# Altium PCB Kicker2018_PCB.PcbDoc
Units mm, origin at the board's own origin, x right, y up, seen from the top; angles counter-clockwise.
Board outline 67.76 x 43.08 mm, 2 copper layers (Top Layer, Bottom Layer); 49 components, 29 nets, 154 pads, 725 vias.
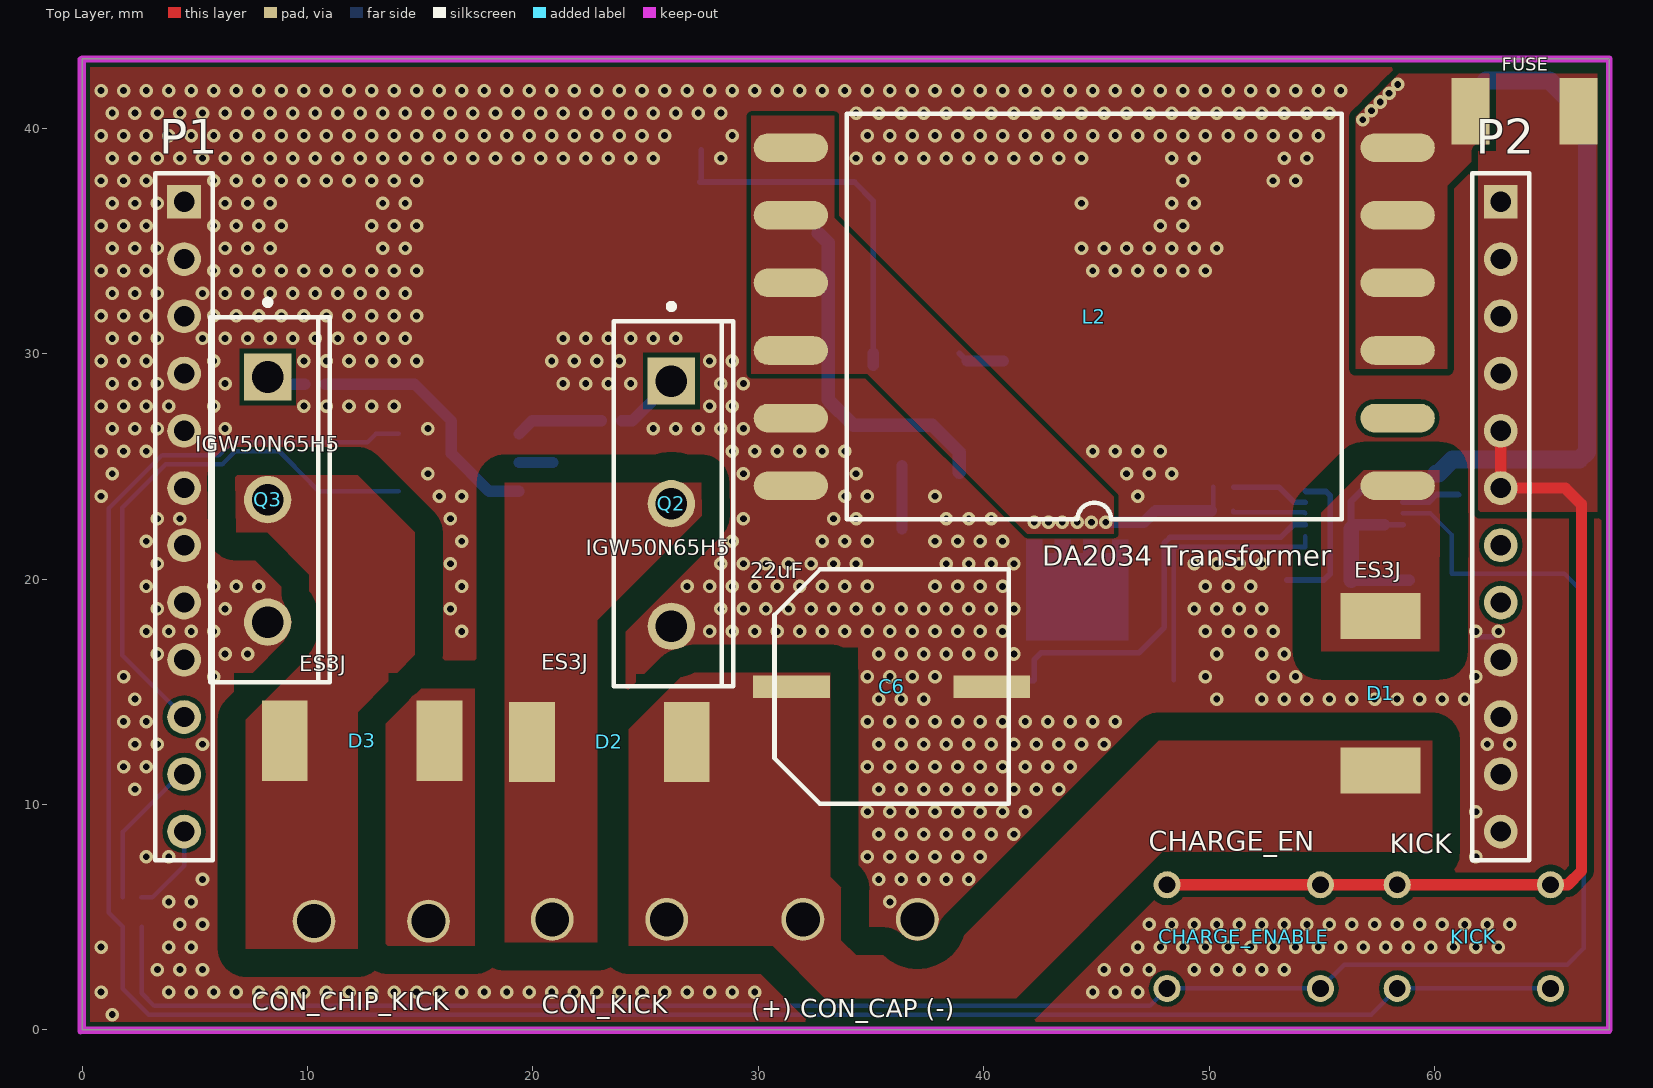
[diagram p0: Top Layer view]
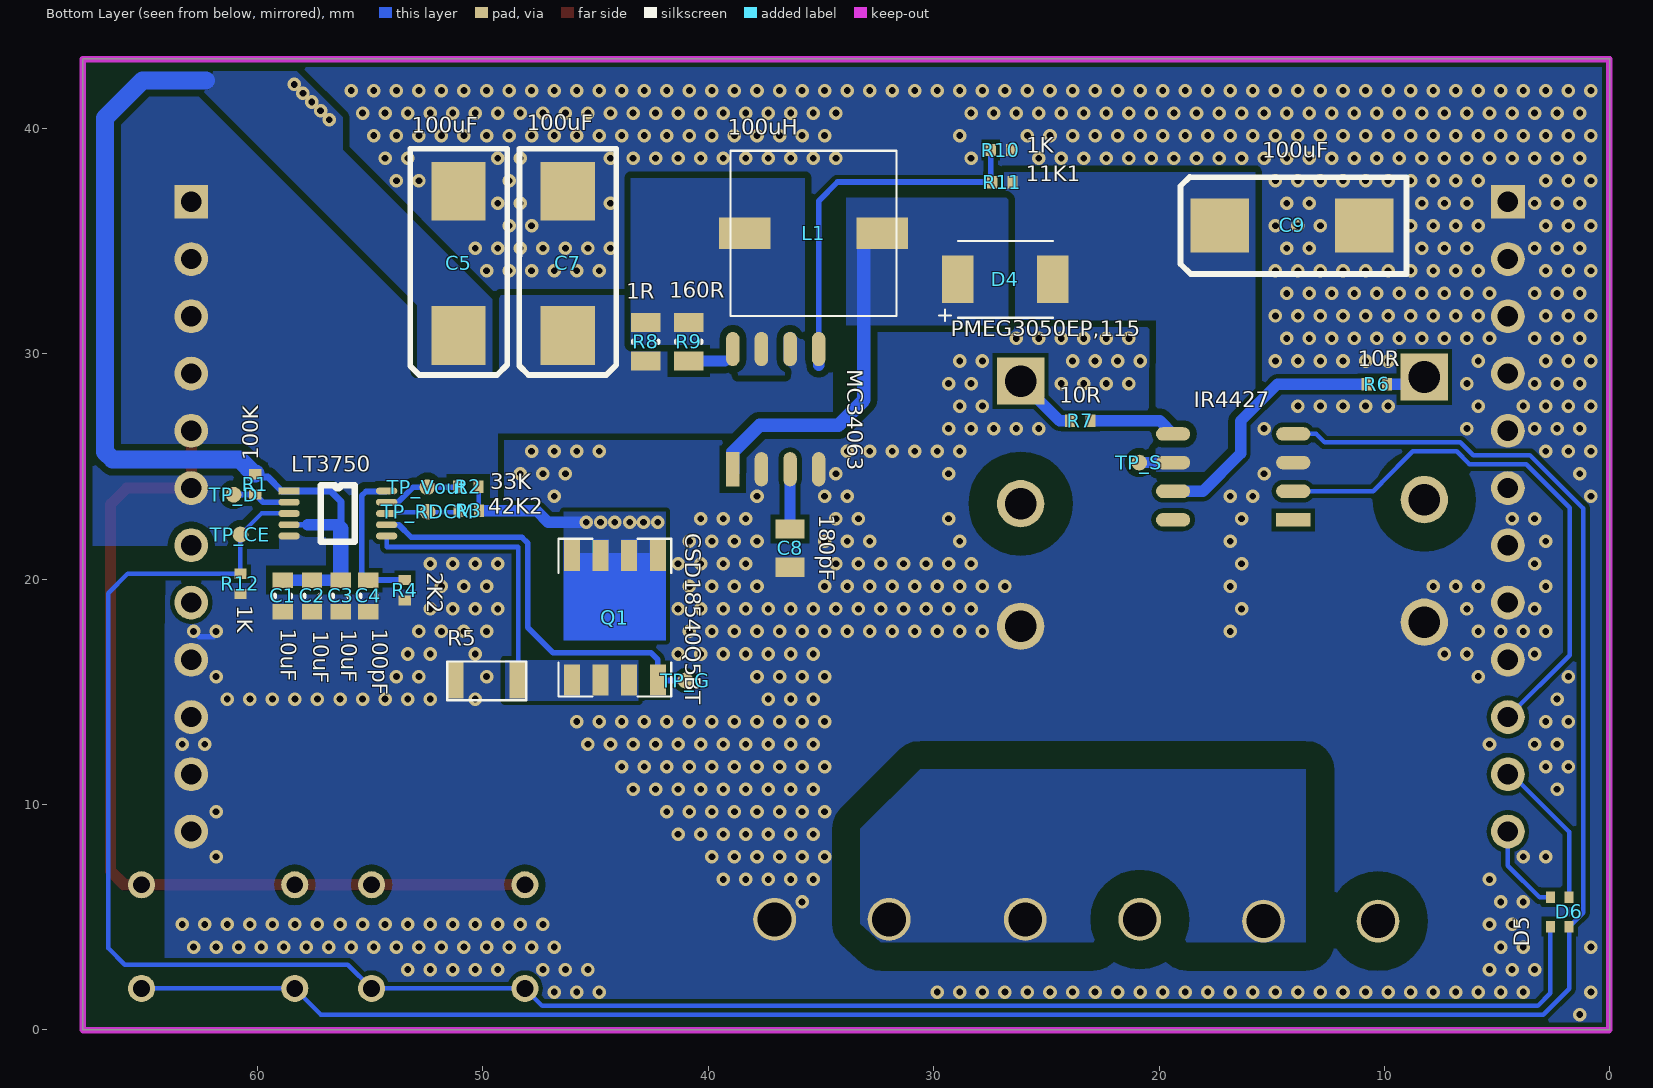
[diagram p1: Bottom Layer view, seen from below]
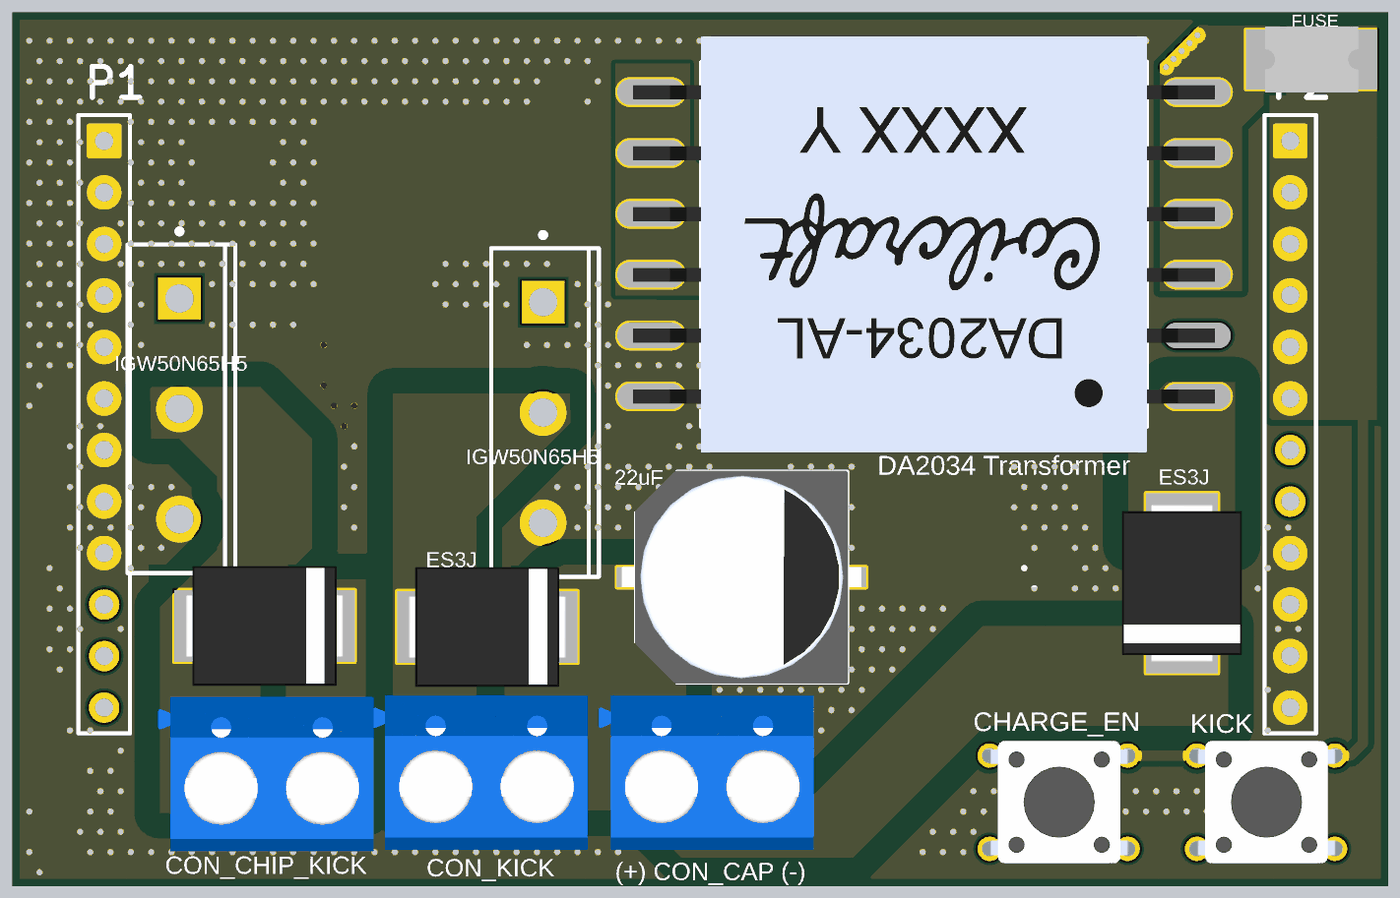
[diagram p2: 3D render of the assembled board from above, using the file's embedded part models]

## Layer stack, top to bottom
Top Solder: solder mask 0.0102, Solder Resist, Dk 3.5
Top Layer: signal copper 0.0356
Dielectric 1: dielectric 0.32, FR-4, Dk 4.8
Bottom Layer: signal copper 0.0356
Bottom Solder: solder mask 0.0102, Solder Resist, Dk 3.5

## Board outline
67.76,0 67.76,43.078 0,43.078 0,0 32.814,0

## Design rules (kind name [scope] priority, off if disabled: settings)
BoardOutlineClearance [All] p1: gap=0.254 ignorepadtopadclearanceinfootprint=FALSE
Clearance Clearance_1 [InNet('NetC1_1') vs InNet('NetC1_1')] p1: gap=0 ignorepadtopadclearanceinfootprint=TRUE
Clearance VCC/Vs [InNetClass('VCC/Vs')] p2: gap=0.3 ignorepadtopadclearanceinfootprint=TRUE
Clearance NetLT3750_6 [OnLayer('Top Layer') vs InNet('NetLT3750_6')] p3: gap=0.5 ignorepadtopadclearanceinfootprint=TRUE
Clearance HV [InNetClass('HV')] p4: gap=1.25 ignorepadtopadclearanceinfootprint=TRUE
Clearance [All] p5: gap=0.2 ignorepadtopadclearanceinfootprint=TRUE
Height [All] p1: minheight=0 maxheight=50 prefheight=12.7
PlaneClearance [InNet('NetC1_1')] p1: clearance=0
PlaneConnect [All] p1: planeconnectstyle=Direct reliefexpansion=0.508 reliefentries=4 reliefconductorwidth=0.254 reliefairgap=0.254
PolygonConnect [All] p1: connectstyle=Direct reliefconductorwidth=0.254 reliefentries=4 polygonreliefangle="90 Angle" airgapwidth=0.254
RoutingVias [All] p1: holewidth=0.3 width=0.6 viastyle="Through Hole" minholewidth=0.3 minwidth=0.6 maxholewidth=2 maxwidth=2
SolderMaskExpansion [All] p1: expansion=0.102
Width [All] p1: maxlimit=5 minlimit=0.2 preferedwidth=0.2
27 further rules are at their usual default settings.

## Classes and differential pairs
net class HV: Cap+ CHIP_KICK- KICK- NetD1_D1-
net class VCC/Vs: NetC1_1 NetD4_2 NetL1_2 VCC Vs

## Components (designator, comment, footprint, x,y, rotation, side; value= is the part's Value field where it differs from the comment)
"(+) CON_CAP (-)" "OSTTA024163" "TERM BLOCK 2P" 34.516,4.902 r0 top (schematic designator CON_CAP)
C1 "10uF" CAPC0603(1608)55_L 58.874,19.256 r270 bottom
C2 "10uF" CAPC0603(1608)55_L 57.579,19.256 r270 bottom
C3 "10uF" CAPC0603(1608)55_L 56.309,19.256 r270 bottom
C4 "100pF" CAPC0603(1608)55_L 55.082,19.256 r90 bottom
C5 "100uF" 7343-CAPPOL 51.07,34.011 r90 bottom
C6 "22uF" "CAP ALUM 22UF 250V" 35.915,15.23 r180 top
C7 "100uF" 7343-CAPPOL 46.225,34.011 r90 bottom
C8 "180pF" 0805-CAP 36.368,21.375 r90 bottom
C9 "100uF" 7343-CAPPOL 14.094,35.687 r180 bottom
CHARGE_ENABLE "CHARGE_EN" "TACTILE SWITCH" 51.534,4.14 r180 top
CON_CHIP_KICK "OSTTA024163" "TERM BLOCK 2P" 12.824,4.826 r0 top
CON_KICK "OSTTA024163" "TERM BLOCK 2P" 23.391,4.902 r0 top
D1 "ES3J" DIODE 57.604,14.935 r90 top
D2 "ES3J" DIODE 23.391,12.776 r180 top
D3 "ES3J" DIODE 12.418,12.827 r180 top
D4 "PMEG3050EP,115" PCBComponent#1 26.82,33.299 r0 bottom
D5 "BAS40 Diode" "DIODE SOD-523" 2.639,5.232 r270 bottom
D6 "BAS40 Diode" "DIODE SOD-523" 1.801,5.232 r270 bottom
FUSE "MF-MSMF250/16X-2" MF-MSMF250/16X-PCB 63.99,40.76 r180 top
IR4427 "GATE DRIVER" IR4427 16.71,24.536 r0 bottom
KICK "KICK" "TACTILE SWITCH" 61.745,4.14 r180 top
L1 "100uH" INDUCTOR 35.329,35.357 r0 bottom
L2 "DA2034 Transformer" "DA2034 TRANSFORMER" 58.362,24.147 r180 top
LT3750 "Flyback Regulator" LT3750 58.599,23.913 r180 bottom
MC34063 "Switching Voltage Regulator" DIP-8 38.91,24.75 r90 bottom
P1 "Header 12" HDR1X12 4.521,36.74 r270 top
P2 "Header 12" HDR1X12 62.941,36.74 r270 top
Q1 "CSD18540Q5BT" PCBComponent#2 44.142,18.288 r270 bottom
Q2 "IGW50N65H5" INF-PG-TO247-3-44 26.14,23.35 r0 top
Q3 "IGW50N65H5" INF-PG-TO247-3-44 8.23,23.53 r0 top
R1 "100K" 0402-RES-HD 60.094,24.206 r270 bottom value=100k
R2 "33K" 0402-RES-HD 50.641,24.103 r180 bottom
R3 "42K2" 0402-RES-HD 50.623,23.034 r180 bottom value=42.2K
R4 "2K2" 0402-RES-HD 53.456,19.51 r270 bottom value=2.2K
R5 "15m" RES1206 49.832,15.519 r0 bottom
R6 "10R" 0402-RES-HD 10.335,28.651 r180 bottom value=10
R7 "10R" 0402-RES-HD 23.492,27.026 r0 bottom value=10
R8 "1R" 0805-RES 42.771,30.531 r90 bottom
R9 "160R" 0805-RES 40.866,30.531 r90 bottom value=160
R10 "1K" 0402-RES-HD 27.016,39.04 r0 bottom
R11 "11K1" 0402-RES-HD 26.947,37.617 r0 bottom value=11k1
R12 "1K" 0402-RES-HD 60.754,19.787 r90 bottom
TP_CE "" TP-PCB 60.754,21.979 r90 bottom net-tie
TP_D "" TP-PCB 61.059,23.749 r90 bottom locked net-tie
TP_G "" TP-PCB 41.01,15.5 r90 bottom locked net-tie
TP_RDCM "" TP-PCB 52.45,22.987 r90 bottom net-tie
TP_S "" TP-PCB 20.876,25.171 r90 bottom locked net-tie
TP_Vout "" TP-PCB 52.46,24.082 r90 bottom net-tie

## Footprints (in the part's own frame and the unit in brackets; to place one, negate y for a bottom-side part, rotate by r counter-clockwise, add the part's x,y. Pads: shape width x height; smd on the part's side, far side on the other; paste and mask are expansions set on the pad)
0402-RES-HD [mm] "Chip Resistor, Body 1.0x0.5mm, IPC High Density"
  rect 0.45x0.55 smd: 1(-0.45,0) 2(0.45,0)
  body extent -0.52,-0.27 0.53,0.28, height 0.4
0805-CAP [mm] "Chip Resistor, Body 2.0x1.3mm, IPC High Density"
  rect 0.85x1.3 smd: 1(-0.85,0) 2(0.85,0)
  body extent -1.1,-0.67 1.1,0.68, height 0.7
0805-RES [mm] "Chip Resistor, Body 2.0x1.3mm, IPC High Density"
  rect 0.85x1.3 smd: 1(-0.85,0) 2(0.85,0)
  silkscreen extent -0.05,-0.55 0.05,0.55, body extent -1.1,-0.67 1.1,0.68, height 0.7
7343-CAPPOL [mm] "SMT Capacitor, 2 Leads, Body 7.3x4.3mm"
  rect 2.6x2.4 smd: 1(-3.202,0.007) 2(3.198,0.007)
  silkscreen extent -4.95,-2.15 5.08,2.16, body extent -3.49,-2.03 3.51,2.04, height 4.05
"CAP ALUM 22UF 250V" [mm] "22uF"
  rect 3.4x1 smd: Cap+(4.445,0) Cap-(-4.445,0)
  silkscreen extent -5.2,-5.2 5.2,5.2, body extent -8.64,-5.25 5.9,5.46, height 10.46
CAPC0603(1608)55_L [mm] "Chip Capacitor, Body 1.6x0.8mm, Height 0.55mm, IPC High Density"
  rect 0.7x0.9 smd: 1(-0.7,0) 2(0.7,0)
  silkscreen extent -0.05,-0.35 0.05,0.35, body extent -0.87,-0.47 0.88,0.48, height 0.55
"DA2034 TRANSFORMER" [mm]
  oval 3.3x1.27 smd: 1(0,0) 2(0,-3) 3(0,-6) 4(0,-9) 5(0,-12) 6(0,-15) 7(26.92,-15) 8(26.92,-12) 9(26.92,-9) 10(26.92,-6) 11(26.92,-3) 12(26.92,0)
  silkscreen extent 2.48,-16.5 24.44,1.5, body extent -0.86,-17.78 27.79,2.79, height 11.18
DIODE [mil]
  rect 80x140 smd: D1+(-135,0) D1-(135,0)
  body extent -154,-116 154,116, height 95
"DIODE SOD-523" [mm]
  rect 0.5x0.4 smd mask+0.05: 1(-0.65,0) 2(0.65,0)
  body extent -0.8,-0.4 0.8,0.4, height 0.7
DIP-8 [mm] "MC34063 Footprint"
  rect 1.52x0.6 smd: 1(0.127,0)
  oval 1.52x0.6 smd: 2(0.127,-1.27) 3(0.127,-2.54) 4(0.127,-3.81) 5(5.461,-3.81) 6(5.461,-2.54) 7(5.461,-1.27) 8(5.461,0)
  body extent -0.21,-4.35 5.79,0.55, height 1.75
HDR1X12 [mm] "Connector; Header; 12 Position"
  rect 1.5x1.5 hole 0.9: 1(0,0)
  round 1.5 hole 0.9: 2(2.54,0) 3(5.08,0) 4(7.62,0) 5(10.16,0) 6(12.7,0) 7(15.24,0) 8(17.78,0) 9(20.32,0) 10(22.86,0) 11(25.4,0) 12(27.94,0)
  silkscreen extent -1.27,-1.27 29.21,1.27
INDUCTOR [mil]
  rect 90x55 smd: 1(-120,0) 2(120,0)
  silkscreen extent -145,-144 145,145, body extent -145,-139 142,149, height 180
INF-PG-TO247-3-44 [mm] "FM, 3-Leads, Body 5.02x15.94mm, Pitch 5.44mm"
  rect 2.1x2.1 hole 1.4: 1(0,5.44)
  round 2.1 hole 1.4: 2(0,0) 3(0,-5.44)
  silkscreen extent -2.56,-8.1 2.75,8.87, body extent -2.53,-8.08 2.72,8.08, height 25.5
IR4427 [mm]
  rect 1.52x0.6 smd: 1(-2.667,1.905)
  oval 1.52x0.6 smd: 2(-2.667,0.635) 3(-2.667,-0.635) 4(-2.667,-1.905) 5(2.667,-1.905) 6(2.667,-0.635) 7(2.667,0.635) 8(2.667,1.905)
  body extent -3,-2.45 3,2.45, height 1.75
LT3750 [mm]
  rect 0.95x0.305 smd: 1(0,0)
  oval 0.95x0.305 smd: 2(0,-0.5) 3(0,-1) 4(0,-1.5) 5(0,-2) 6(4.33,-2) 7(4.33,-1.5) 8(4.33,-1) 9(4.33,-0.5) 10(4.33,0)
  silkscreen extent 1.41,-2.25 2.92,0.25, body extent -0.29,-2.52 4.61,0.48, height 1.15
MF-MSMF250/16X-PCB [mm] "Chip PTC RESETTABLE"
  rect 1.68x2.95 smd: 1(-2.39,0) 2(2.39,0)
  body extent -2.3,-1.62 2.3,1.62, height 1.15
PCBComponent#1 [mm]
  rect 1.4x2.1 smd: 1(-2.1,0) 2(2.1,0)
  silkscreen extent -2.1,-1.7 2.93,1.85, body extent -2.5,-1.35 2.5,1.35, height 1.1
PCBComponent#2 [mm]
  rect 1.372x0.711 smd: 1(2.769,-1.905) 2(2.769,-0.635) 3(2.769,0.635) 4(2.769,1.905) 5(-2.769,1.905) 6(-2.769,0.635) 7(-2.769,-0.635) 8(-2.769,-1.905)
  Top Layer region: -3.454,2.261 0.991,2.261 0.991,-2.261 -3.454,-2.261 -3.454,-1.549 -2.87,-1.549 -2.87,-0.991 -3.454,-0.991 -3.454,-0.279 -2.87,-0.279 -2.87,0.279 -3.454,0.279 -3.454,0.991 -2.87,0.991 -2.87,1.549 -3.454,1.549
  silkscreen extent -3.5,-2.5 3.5,2.5, body extent -3.28,-2.53 2.72,2.47, height 1.1
RES1206 [mil]
  rect 30x65 smd: 1(-55,0) 2(55,0)
  silkscreen extent -69,-33 69,35, body extent -63,-33 63,33, height 21
"TACTILE SWITCH" [mm]
  round 1.2 hole 0.75: 1(-3.4,-2.3) 2(3.4,-2.3) 3(-3.4,2.3) 4(3.4,2.3)
  body extent -3.9,-3.01 3.85,3.02, height 3.01
"TERM BLOCK 2P" [mm]
  round 1.9 hole 1.5: 1(-2.54,0) 2(2.54,0)
  body extent -5.64,-3.1 4.96,4.5, height 10
TP-PCB [mm]
  round 0.7 smd paste-1: 1(0,0)

## Part data
"(+) CON_CAP (-)" CON_CHIP_KICK CON_KICK: library part "Term Block 2P", "2 Position Wire to Board Terminal Block Horizontal with Board 0.200\" (5.08mm) Through Hole"
C1 C2 C3: library part C0603-10uF-16V-1, "CAP CER 10UF 16V X5R 0603", Part No=EMK107BBJ106MA-T, Cod EMS=05.281.019.592
C4: library part CC0603--1, "CAP CER 100PF 50V NP0 0603", Part No=GRM1885C1H101JA01D
C5 C7 C9: library part CT2917-100uF-1, "CAP TANT 100uF 25V 20% ESR = 30mOhm @ 100 kHz", Part No=T521X107M025ATE030
C6: library part "CAP ALUM 22UF 250V"
C8: library part CC0805-180pF-2, "CAP CER 180PF 50V NP0 0805", Part No=C0805C181K5GACTU, Cod EMS=05.281.019.399
CHARGE_ENABLE KICK: library part SW-SPST, "Single-Pole, Single-Throw Switch", LatestRevisionDate=17-Jul-2002, LatestRevisionNote="Re-released for DXP Platform.", PackageDescription="Switch; 2 Leads", PackageReference=SPST-2, Published=24-Mar-1999, Publisher="Altium Limited"
D4: library part PMEG3050EP,115-01.A.5, "DIODE SCHOTTKY 30V 5A SOD128", Cod EMS=05.284.051.031, Part No=PMEG3050EP,115
FUSE: "PTC RESETTABLE"
IR4427: library part IR4427, "IC DRIVER DUAL LOW SIDE 8-SOIC"
L1: library part Inductor, "Fixed Inductors 100uH 0.86A SMT"
LT3750: library part LT3750
MC34063: library part MC34063
P1 P2: "Header, 12-Pin", LatestRevisionDate=17-Jul-2002, LatestRevisionNote="Re-released for DXP Platform.", Publisher="Altium Limited"
Q1: library part CSD18540Q5BT-1, "MOSFET N-CH 60V 100A 8VSON", Part No=CSD18540Q5BT
Q2 Q3: "650 V IGBT High Speed Switching Series Fifth Generation, 80 A IC, PG-TO247-3-44, Tube, Green", Manufacturer=Infineon, Supplier Part Number 1=N/A, Switching Frequency="TRENCHSTOP5 10-120 kHz", ComponentLink1Description="Manufacturer URL", ComponentLink1URL=http://www.infineon.com/, ComponentLink2Description=Datasheet, ComponentLink2URL=http://www.infineon.com/dgdl/DS_IGW50N65H5_1_1.pdf?folderId=db3a3043156fd5730115f56849b61941&fileId=db3a30433af5291e013af900f52c5c25&location=en.Products.IGBTs.IGBT_with_Anti-Parallel_Diode.TRENCHSTOP_5.DATASHEET.DS_IGW50N65H5_1_1.pdf, ComponentLink3Description="Package Specification", ComponentLink3URL=http://www.infineon.com/cms/packages/Leaded_and_through-hole/P-PG-TO247/P-PG-TO247-3-44.html?__locale=en, DatasheetVersion="Rev. 1.1", Green=TRUE, Group="IGBT without Anti-Parallel Diode", Halogen-free=available, IC(max)@ 25degrees="80 A", IC(max)@ 100degrees="56 A", ICpuls(max)="150 A", Mounting Technology="Through Hole", PackageDescription="3-Pin Plastic (Green) Transistor Single Outline Package, 15.94 x 20.95 mm Body, 5.44 mm Pitch", PackageReference=PG-TO247-3-44, PackageVersion="Rev. 03", Packing=Tube, PartNumber=IGW50N65H5, Ptot(max)="305 W", Supplier 1=Mouser, VCE(max)="650 V", VCE(sat)(typ)="1.65 V"
R1: library part R0402-100K-11, "RES 100K OHM 1/10W 1% 0402 SMD 1", Part No=ERJ-2GEJ104X, Cod EMS=05.280.029.504, Family=ERJ-2GE....X, Family Description="RESISTOR FILME ESPESSO 0R-1M / 1/10W / 5% /  0402. P/N: ERJ-2GE....X – PANASONIC ELECTRONIC COMPONENTS."
R2: library part R0402-33K-7, "RES 33K OHM 1/10W 1% 0402 SMD", Part No=ERJ-2RKF3302X, Cod EMS=05.280.029.535, Family=ERJ-2RKF....X, Family Description="RESISTOR FILME ESPESSO 10R-1M / 1/10W / 1% / 0402. P/N: ERJ-2RKF....X – PANASONIC ELECTRONIC COMPONENTS."
R3: library part RESISTOR, "RES 42.2K OHM 1/10W 1% 0402 SMD", Part No=ERJ-2RKF4222X
R4: library part R0402-2K2-5, "RES 2.2K OHM 1/10W 1% 0402 SMD", Part No=ERJ-2RKF2201X, Cod EMS=05.280.029.541, Family=ERJ-2RKF....X, Family Description="RESISTOR FILME ESPESSO 10R-1M / 1/10W / 1% / 0402. P/N: ERJ-2RKF....X – PANASONIC ELECTRONIC COMPONENTS."
R5: library part Res2, "Resistor", LatestRevisionDate=17-Jul-2002, LatestRevisionNote="Re-released for DXP Platform.", PackageDescription="Axial Device, Thru-Hole; 2 Leads; 0.4 in Pin Spacing", PackageReference=AXIAL-0.4, Published=8-Jun-2000, Publisher="Altium Limited"
R6 R7: library part R0402-10R-6, "RES 10 OHM 1/10W 1% 0402 SMD", Part No=ERJ-2RKF10R0X, Cod EMS=05.280.029.523, Family=ERJ-2RKF....X, Family Description="RESISTOR FILME ESPESSO 10R-1M / 1/10W / 1% / 0402. P/N: ERJ-2RKF....X – PANASONIC ELECTRONIC COMPONENTS."
R8: library part R0805-1R-1%-1, "RES SMD 1 OHM 1% 1/8W 0805", Part No=CRCW08051R00FKEA, Cod EMS=05.280.029.391
R9: library part R0805-160R-5, "RES 160 OHM 1/8W .5% 0805 SMD", Part No=ERA-6AED161V, Cod EMS=05.280.029.516, Family=ERA-6AED...V
R10 R12: library part R0402-1K-A.9, "RES 1K OHM 1/10W 1% 0402 SMD", Part No=ERJ-2RKF1001X, Cod EMS=05.280.029.527, Family=ERJ-2RKF....X, Family Description="RESISTOR FILME ESPESSO 10R-1M / 1/10W / 1% / 0402. P/N: ERJ-2RKF....X – PANASONIC ELECTRONIC COMPONENTS."
R11: library part R0402-11K1-1, "RES 11.1 KOHM 1/16W 0.1% 0402 SMD", Part No=TNPW040211K1BEED
TP_CE TP_D TP_G TP_RDCM TP_S TP_Vout: library part TESTPOINT-CMP-2, "TESTPOINT"

## Via types
v1: diameter 0.6, hole 0.3, Top Layer to Bottom Layer, tented both sides, 714 vias
v2: diameter 0.6, hole 0.3, Top Layer to Bottom Layer, 11 vias

## Nets (pads, with @x,y where several pads share a name; then routed paths per layer and width w, separated by ;. In a path a pad name is that pad's centre, name@x,y a point inside that pad or via, vN(x,y) a via of type N, cw(c..) or ccw(c..) an arc to the next point about the centre after c; other vN are vias at no path point)
Cap+: "(+) CON_CAP (-).1" C6.Cap+ CON_CHIP_KICK.2 CON_KICK.2 D1.D1+ D2.D1+ D3.D1+
CHARGE_ENABLE: CHARGE_ENABLE.3 CHARGE_ENABLE.4 D5.2 LT3750.3 R12.2 TP_CE.1 | length 94.5
  Bottom Layer w0.2: D5.2 2.639,1.627 3.187,1.078 47.372,1.078 CHARGE_ENABLE.4 CHARGE_ENABLE.3 55.989,2.896 65.885,2.896 66.621,3.632 66.621,19.38 65.765,20.237 R12.2 TP_CE.1 59.82,22.913 LT3750.3
CHIP_KICK: Q3.1 R6.2 | length 2.2
  Bottom Layer w0.5: Q3.1@7.77,28.958 Q3.1@7.897,28.831 ; Q3.1@7.897,28.651 R6.2
CHIP_KICK-: CON_CHIP_KICK.1 D3.D1- Q3.2
CHIP_KICK_SIGNAL: IR4427.2 P1.10 | length 24.5
  Bottom Layer w0.2: P1.10 1.775,16.626 1.775,23.165 3.706,25.095 6.224,25.095 6.796,25.667 8.743,25.667 10.12,24.291 10.12,24.28 10.498,23.901 IR4427.2
GATE: LT3750.7 Q1.4 TP_G.1 | length 18.9
  Bottom Layer w0.254: TP_G.1 42.218,15.5 Q1.4 42.237,16.434 42.542,16.739 46.886,16.739 48.008,17.861 48.008,21.603 48.258,21.853 53.171,21.853 53.728,22.41 54.266,22.41 LT3750.7
GND: "(+) CON_CAP (-).2" C1.2 C2.2 C3.2 C4.1 C5.2 C6.Cap- C7.2 C8.1 C9.2 IR4427.3 L2.11 L2.12 LT3750.5 MC34063.2 MC34063.4 P1.1 P1.2 P1.3 P1.4 P1.5 P1.6 P1.7 P1.8 P1.9 P2.9 P2.10 P2.11 P2.12 Q2.3 Q3.3 R4.2 R5.2 R10.1 R12.1 | length 1.2
  Bottom Layer w0.254: P1.6 P1.6@5.089,24.04 ; v1@61.966,17.448 62.587,17.448
  other v1: 1.337,0.678 0.837,1.678 3.837,1.678 4.837,1.678 5.837,1.678 6.837,1.678 7.837,1.678 8.837,1.678 9.837,1.678 10.837,1.678 11.837,1.678 12.837,1.678 13.837,1.678 14.837,1.678 15.837,1.678 16.837,1.678 17.837,1.678 18.837,1.678 19.837,1.678 20.837,1.678 21.837,1.678 22.837,1.678 23.837,1.678 24.837,1.678 25.837,1.678 26.837,1.678 27.837,1.678 28.837,1.678 29.837,1.678 44.837,1.678 45.837,1.678 46.837,1.678 3.337,2.678 4.337,2.678 5.337,2.678 45.337,2.678 46.337,2.678 47.337,2.678 49.337,2.678 50.337,2.678 51.337,2.678 52.337,2.678 53.337,2.678 0.837,3.678 3.837,3.678 4.837,3.678 46.837,3.678 47.837,3.678 48.837,3.678 49.837,3.678 50.837,3.678 51.837,3.678 52.837,3.678 53.837,3.678 54.837,3.678 55.837,3.678 56.837,3.678 57.837,3.678 58.837,3.678 59.837,3.678 60.837,3.678 61.837,3.678 62.837,3.678 4.337,4.678 5.337,4.678 47.337,4.678 48.337,4.678 49.337,4.678 50.337,4.678 51.337,4.678 52.337,4.678 53.337,4.678 54.337,4.678 55.337,4.678 56.337,4.678 57.337,4.678 58.337,4.678 59.337,4.678 60.337,4.678 61.337,4.678 62.337,4.678 63.337,4.678 3.837,5.678 4.837,5.678 35.837,5.678 5.337,6.678 35.337,6.678 36.337,6.678 37.337,6.678 38.337,6.678 39.337,6.678 2.837,7.678 3.837,7.678 34.837,7.678 35.837,7.678 36.837,7.678 37.837,7.678 38.837,7.678 39.837,7.678 61.837,7.678 35.337,8.678 36.337,8.678 37.337,8.678 38.337,8.678 39.337,8.678 40.337,8.678 41.337,8.678 34.837,9.678 35.837,9.678 36.837,9.678 37.837,9.678 38.837,9.678 39.837,9.678 40.837,9.678 41.837,9.678 61.837,9.678 2.337,10.678 35.337,10.678 35.337,10.678 36.337,10.678 37.337,10.678 38.337,10.678 39.337,10.678 40.337,10.678 40.337,10.678 41.337,10.678 42.337,10.678 43.337,10.678 1.837,11.678 2.837,11.678 34.837,11.678 35.837,11.678 36.837,11.678 37.837,11.678 38.837,11.678 39.837,11.678 40.837,11.678 41.837,11.678 42.837,11.678 43.837,11.678 2.337,12.678 3.337,12.678 5.337,12.678 35.337,12.678 36.337,12.678 37.337,12.678 38.337,12.678 39.337,12.678 40.337,12.678 41.337,12.678 42.337,12.678 43.337,12.678 44.337,12.678 45.337,12.678 62.337,12.678 63.337,12.678 1.837,13.678 2.837,13.678 34.837,13.678 35.837,13.678 36.837,13.678 37.837,13.678 38.837,13.678 39.837,13.678 40.837,13.678 41.837,13.678 42.837,13.678 43.837,13.678 44.837,13.678 45.837,13.678 2.337,14.678 35.337,14.678 36.337,14.678 37.337,14.678 50.337,14.678 52.337,14.678 53.337,14.678 54.337,14.678 55.337,14.678 56.337,14.678 57.337,14.678 58.337,14.678 59.337,14.678 60.337,14.678 61.337,14.678 1.837,15.678 5.837,15.678 34.837,15.678 35.837,15.678 36.837,15.678 37.837,15.678 37.837,15.678 49.837,15.678 52.837,15.678 52.837,15.678 53.837,15.678 61.837,15.678 3.337,16.678 6.337,16.678 7.337,16.678 35.337,16.678 36.337,16.678 37.337,16.678 38.337,16.678 39.337,16.678 40.337,16.678 41.337,16.678 50.337,16.678 52.337,16.678 53.337,16.678 2.837,17.678 3.837,17.678 4.837,17.678 5.837,17.678 16.837,17.678 27.837,17.678 28.837,17.678 29.837,17.678 30.837,17.678 31.837,17.678 32.837,17.678 33.837,17.678 34.837,17.678 35.837,17.678 36.837,17.678 37.837,17.678 38.837,17.678 39.837,17.678 40.837,17.678 49.837,17.678 50.837,17.678 51.837,17.678 52.837,17.678 61.837,17.678 62.837,17.678 3.337,18.678 6.337,18.678 16.337,18.678 28.337,18.678 29.337,18.678 30.337,18.678 31.337,18.678 32.337,18.678 33.337,18.678 34.337,18.678 35.337,18.678 36.337,18.678 37.337,18.678 38.337,18.678 39.337,18.678 40.337,18.678 41.337,18.678 49.337,18.678 50.337,18.678 51.337,18.678 52.337,18.678 2.837,19.678 5.837,19.678 6.837,19.678 7.837,19.678 16.837,19.678 26.837,19.678 27.837,19.678 28.837,19.678 29.837,19.678 30.837,19.678 31.837,19.678 32.837,19.678 33.837,19.678 34.837,19.678 37.837,19.678 38.837,19.678 39.837,19.678 40.837,19.678 49.837,19.678 50.837,19.678 51.837,19.678 3.337,20.678 16.337,20.678 28.337,20.678 29.337,20.678 30.337,20.678 30.337,20.678 31.337,20.678 32.337,20.678 33.337,20.678 34.337,20.678 38.337,20.678 39.337,20.678 40.337,20.678 40.337,20.678 41.337,20.678 49.337,20.678 50.337,20.678 50.337,20.678 51.337,20.678 52.337,20.678 2.837,21.678 16.837,21.678 28.837,21.678 32.837,21.678 33.837,21.678 34.837,21.678 37.837,21.678 38.837,21.678 39.837,21.678 40.837,21.678 3.337,22.678 4.337,22.678 16.337,22.678 29.337,22.678 33.337,22.678 34.337,22.678 38.337,22.678 39.337,22.678 40.337,22.678 0.837,23.678 15.837,23.678 16.837,23.678 33.837,23.678 34.837,23.678 37.837,23.678 46.837,23.678 1.337,24.678 15.337,24.678 29.337,24.678 34.337,24.678 46.337,24.678 47.337,24.678 48.337,24.678 0.837,25.678 1.837,25.678 2.837,25.678 2.837,25.678 28.837,25.678 29.837,25.678 30.837,25.678 31.837,25.678 32.837,25.678 32.837,25.678 33.837,25.678 44.837,25.678 45.837,25.678 46.837,25.678 47.837,25.678 47.837,25.678 1.337,26.678 2.337,26.678 3.337,26.678 6.337,26.678 15.337,26.678 25.337,26.678 26.337,26.678 27.337,26.678 28.337,26.678 29.337,26.678 0.837,27.678 1.837,27.678 2.837,27.678 3.837,27.678 5.837,27.678 9.837,27.678 10.837,27.678 11.837,27.678 12.837,27.678 13.837,27.678 27.837,27.678 28.837,27.678 1.337,28.678 2.337,28.678 3.337,28.678 6.337,28.678 21.337,28.678 22.337,28.678 23.337,28.678 24.337,28.678 28.337,28.678 29.337,28.678 0.837,29.678 1.837,29.678 2.837,29.678 5.837,29.678 9.837,29.678 10.837,29.678 11.837,29.678 12.837,29.678 13.837,29.678 14.837,29.678 20.837,29.678 21.837,29.678 22.837,29.678 23.837,29.678 27.837,29.678 28.837,29.678 1.337,30.678 2.337,30.678 3.337,30.678 5.337,30.678 5.337,30.678 6.337,30.678 7.337,30.678 8.337,30.678 9.337,30.678 10.337,30.678 10.337,30.678 11.337,30.678 12.337,30.678 13.337,30.678 14.337,30.678 21.337,30.678 22.337,30.678 23.337,30.678 24.337,30.678 25.337,30.678 25.337,30.678 26.337,30.678 0.837,31.678 1.837,31.678 2.837,31.678 5.837,31.678 6.837,31.678 7.837,31.678 8.837,31.678 9.837,31.678 10.837,31.678 11.837,31.678 12.837,31.678 13.837,31.678 14.837,31.678 1.337,32.678 2.337,32.678 3.337,32.678 5.337,32.678 6.337,32.678 7.337,32.678 8.337,32.678 9.337,32.678 10.337,32.678 11.337,32.678 12.337,32.678 13.337,32.678 14.337,32.678 0.837,33.678 1.837,33.678 2.837,33.678 5.837,33.678 6.837,33.678 7.837,33.678 8.837,33.678 9.837,33.678 10.837,33.678 11.837,33.678 12.837,33.678 13.837,33.678 14.837,33.678 44.837,33.678 45.837,33.678 46.837,33.678 47.837,33.678 48.837,33.678 49.837,33.678 1.337,34.678 2.337,34.678 3.337,34.678 6.337,34.678 7.337,34.678 8.337,34.678 13.337,34.678 14.337,34.678 44.337,34.678 45.337,34.678 46.337,34.678 47.337,34.678 48.337,34.678 49.337,34.678 50.337,34.678 0.837,35.678 1.837,35.678 2.837,35.678 2.837,35.678 5.837,35.678 6.837,35.678 7.837,35.678 7.837,35.678 8.837,35.678 12.837,35.678 12.837,35.678 13.837,35.678 14.837,35.678 47.837,35.678 47.837,35.678 48.837,35.678 1.337,36.678 2.337,36.678 3.337,36.678 6.337,36.678 7.337,36.678 8.337,36.678 13.337,36.678 14.337,36.678 44.337,36.678 48.337,36.678 49.337,36.678 0.837,37.678 1.837,37.678 2.837,37.678 5.837,37.678 6.837,37.678 7.837,37.678 8.837,37.678 9.837,37.678 10.837,37.678 11.837,37.678 12.837,37.678 13.837,37.678 14.837,37.678 48.837,37.678 52.837,37.678 53.837,37.678 1.337,38.678 2.337,38.678 3.337,38.678 4.337,38.678 5.337,38.678 6.337,38.678 7.337,38.678 8.337,38.678 9.337,38.678 10.337,38.678 11.337,38.678 12.337,38.678 13.337,38.678 14.337,38.678 15.337,38.678 16.337,38.678 17.337,38.678 18.337,38.678 19.337,38.678 20.337,38.678 21.337,38.678 22.337,38.678 23.337,38.678 24.337,38.678 25.337,38.678 28.337,38.678 34.337,38.678 35.337,38.678 36.337,38.678 37.337,38.678 38.337,38.678 39.337,38.678 40.337,38.678 41.337,38.678 42.337,38.678 43.337,38.678 44.337,38.678 48.337,38.678 49.337,38.678 53.337,38.678 54.337,38.678 0.837,39.678 1.837,39.678 2.837,39.678 3.837,39.678 4.837,39.678 5.837,39.678 6.837,39.678 7.837,39.678 8.837,39.678 9.837,39.678 10.837,39.678 11.837,39.678 12.837,39.678 13.837,39.678 14.837,39.678 15.837,39.678 16.837,39.678 17.837,39.678 18.837,39.678 19.837,39.678 20.837,39.678 21.837,39.678 22.837,39.678 23.837,39.678 24.837,39.678 25.837,39.678 28.837,39.678 34.837,39.678 35.837,39.678 36.837,39.678 37.837,39.678 38.837,39.678 39.837,39.678 40.837,39.678 41.837,39.678 42.837,39.678 43.837,39.678 44.837,39.678 45.837,39.678 46.837,39.678 47.837,39.678 48.837,39.678 49.837,39.678 50.837,39.678 51.837,39.678 52.837,39.678 53.837,39.678 54.837,39.678 1.337,40.678 2.337,40.678 3.337,40.678 4.337,40.678 5.337,40.678 6.337,40.678 7.337,40.678 8.337,40.678 9.337,40.678 10.337,40.678 11.337,40.678 12.337,40.678 13.337,40.678 14.337,40.678 15.337,40.678 16.337,40.678 17.337,40.678 18.337,40.678 19.337,40.678 20.337,40.678 21.337,40.678 22.337,40.678 23.337,40.678 24.337,40.678 25.337,40.678 26.337,40.678 27.337,40.678 28.337,40.678 34.337,40.678 35.337,40.678 36.337,40.678 37.337,40.678 38.337,40.678 39.337,40.678 40.337,40.678 41.337,40.678 42.337,40.678 43.337,40.678 44.337,40.678 45.337,40.678 46.337,40.678 47.337,40.678 48.337,40.678 49.337,40.678 50.337,40.678 51.337,40.678 52.337,40.678 53.337,40.678 54.337,40.678 55.337,40.678 0.837,41.678 1.837,41.678 2.837,41.678 3.837,41.678 4.837,41.678 5.837,41.678 6.837,41.678 7.837,41.678 8.837,41.678 9.837,41.678 10.837,41.678 11.837,41.678 12.837,41.678 13.837,41.678 14.837,41.678 15.837,41.678 16.837,41.678 17.837,41.678 18.837,41.678 19.837,41.678 20.837,41.678 21.837,41.678 22.837,41.678 23.837,41.678 24.837,41.678 25.837,41.678 26.837,41.678 27.837,41.678 28.837,41.678 29.837,41.678 30.837,41.678 31.837,41.678 32.837,41.678 33.837,41.678 34.837,41.678 35.837,41.678 36.837,41.678 37.837,41.678 38.837,41.678 39.837,41.678 40.837,41.678 41.837,41.678 42.837,41.678 43.837,41.678 44.837,41.678 45.837,41.678 46.837,41.678 47.837,41.678 48.837,41.678 49.837,41.678 50.837,41.678 51.837,41.678 52.837,41.678 53.837,41.678 54.837,41.678 55.837,41.678
KICK: Q2.1 R7.2 | length 2.4
  Bottom Layer w0.5: R7.2 24.407,27.026 Q2.1@25.804,28.423
KICK-: CON_KICK.1 D2.D1- Q2.2
KICK_SIGNAL: D6.2 IR4427.4 KICK.3 KICK.4 | length 100.1
  Bottom Layer w0.2: IR4427.4 13.031,26.441 12.657,26.067 6.631,26.067 6.059,25.495 3.54,25.495 1.18,23.135 1.18,5.203 D6.2 1.801,1.829 2.951,0.678 57.183,0.678 KICK.4 KICK.3
NetC1_1: C1.1 C2.1 C3.1 C5.1 FUSE.2 L2.3 L2.4 L2.5 L2.6 LT3750.1 LT3750.4 R1.1 | length 39.8
  Bottom Layer w0.2: 56.29,22.244 56.309,22.225 ; R1.1@59.969,24.531 R1.1 R1.1@60.144,24.656
  Bottom Layer w0.254: 57.783,22.413 LT3750.4
  Bottom Layer w0.3: 56.29,22.244 56.29,23.45 56.753,23.913 LT3750.1 58.922,23.913 59.54,24.531 R1.1@59.969,24.531
  Bottom Layer w0.5: C3.1 C2.1 C1.1 ; 56.309,22.225 56.497,22.413 57.783,22.413
  Bottom Layer w0.7: C3.1 56.309,22.225
  Bottom Layer w0.8: R1.1@60.094,24.681 60.169,24.681 60.787,25.3 66.42,25.3 66.76,25.64 66.76,40.46 65.1,42.12 62.29,42.12
  other v2: 56.82,40.38 57.2,40.78 57.59,41.17 57.98,41.56 58.37,41.95
NetC4_2: C4.2 LT3750.10 R4.1 | length 6.7
  Bottom Layer w0.254: R4.1 55.078,19.96 C4.2 55.369,20.243 55.369,23.712 55.188,23.893 54.29,23.893 LT3750.10
NetC8_2: C8.2 MC34063.3 | length 2.8
  Bottom Layer w0.5: C8.2 MC34063.3@36.368,25.043
NetD1_D1-: D1.D1- L2.1
NetD4_2: D4.2 L1.1 MC34063.1 | length 15.2
  Bottom Layer w0.6: L1.1@32.662,35.357 33.093,34.925 33.093,27.952 34.222,26.823 37.715,26.823 38.91,25.629 MC34063.1 MC34063.1@38.91,24.75
NetD5_1: D5.1 P1.12 | length 4
  Bottom Layer w0.2: D5.1@2.628,5.883 3.117,5.883 4.521,7.286 P1.12
NetD6_1: D6.1 P1.11 | length 6.7
  Bottom Layer w0.2: D6.1 1.801,8.784 4.357,11.34 P1.11
NetIR4427_5: IR4427.5 R7.1 | length 3.9
  Bottom Layer w0.5: IR4427.5 19.962,27.026 R7.1
NetIR4427_7: IR4427.7 R6.1 | length 11.4
  Bottom Layer w0.5: R6.1 14.741,28.651 16.379,27.013 16.379,25.579 18.057,23.901 IR4427.7
NetL1_2: L1.2 MC34063.7 R8.2 R9.2
NetL2_7: L2.7 L2.8 L2.9 L2.10 Q1.5 Q1.6 Q1.7 Q1.8 R2.2 R3.2 | length 6
  Bottom Layer w0.2: R3.2@50.105,23.04 50.191,23.126 R2.2
  Bottom Layer w0.5: v2(45.412,22.523) 47.108,22.523 47.625,23.04 R3.2@50.105,23.04
  other v2: 42.237,22.523 42.872,22.523 43.482,22.523 44.142,22.523 44.777,22.523
NetLT3750_2: LT3750.2 R1.2 TP_D.1 | length 2.6
  Bottom Layer w0.254: LT3750.2 59.751,23.413 R1.2 61.052,23.756 TP_D.1
NetMC34063_5: MC34063.5 R10.2 R11.2 | length 16.8
  Bottom Layer w0.254: R10.2 27.466,37.686 R11.2 34.262,37.617 35.1,36.779 MC34063.5@35.1,30.023
  Bottom Layer w0.5: MC34063.5@35.1,29.489 MC34063.5@35.1,30.023
NetMC34063_8: MC34063.8 R9.1 | length 2.1
  Bottom Layer w0.254: MC34063.8@38.91,30.023 39.252,29.681
  Bottom Layer w0.5: 39.252,29.681 R9.1
RDCM: LT3750.8 R3.1 TP_RDCM.1 | length 3.3
  Bottom Layer w0.2: R3.1 51.073,22.961 54.221,22.961 LT3750.8
RVOut: LT3750.9 R2.1 TP_Vout.1 | length 3.5
  Bottom Layer w0.254: R2.1@51.091,24.082 53.096,24.082 53.764,23.413 LT3750.9
Source: LT3750.6 Q1.1 Q1.2 Q1.3 R5.1 | length 12.2
  Bottom Layer w0.2: R5.1 48.435,21.426 54.269,21.426 LT3750.6
VCC: C7.1 CHARGE_ENABLE.1 CHARGE_ENABLE.2 FUSE.1 KICK.1 KICK.2 MC34063.6 P2.1 P2.2 P2.3 P2.4 P2.5 P2.6 R8.1 | length 41.3
  Top Layer w0.5: CHARGE_ENABLE.2 KICK.2 KICK.1 65.911,6.44 66.52,7.049 66.52,23.317 65.797,24.04 P2.6 P2.5
Vs: C9.1 D4.1 IR4427.6 R11.1 TP_S.1 | length 1.5
  Bottom Layer w0.5: IR4427.6 TP_S.1
pads on no net: IR4427.1 IR4427.8 L2.2 P2.7 P2.8

## Polygon pours and split planes (outlines as drawn)
GND on Top Layer "GND" (solid, remove dead copper, pour order 102): 33.093,0 0,0 0,43.078 67.76,43.078 67.76,0
KICK- on Top Layer "KICK-_L01_P095" (solid, remove dead copper, pour order 95): 27.462,24.282 18.742,24.282 18.742,3.886 22.857,3.886 22.857,18.186 27.492,22.821
NetL2_7 on Top Layer "HV L2_7" (solid, remove dead copper, pour order 93): 29.69,29.12 29.69,40.55 33.373,40.55 33.373,36.043 45.768,23.647 45.768,22.022 41.94,22.022 34.839,29.104
NetC1_1 on Top Layer "NETC1_1_L01_P091" (solid, pour order 91): 58.431,42.441 56.505,40.515 56.505,29.333 60.565,29.333 60.565,37.455 62.44,39.33 62.44,42.43 60.565,42.43
CHIP_KICK- on Top Layer "CHIP_KICK-_L01_P094" (solid, remove dead copper, pour order 94): 6.83,22.073 8.201,22.073 10.081,20.193 10.081,16.586 7.262,13.767 7.262,3.607 12.215,3.607 12.215,14.097 14.755,16.637 14.755,22.073 12.215,24.613 6.786,24.613
Cap+ on Top Layer "Top Layer-Cap+" (solid, pour order 96): 47.775,12.827 59.89,12.827 59.89,7.899 47.921,7.899 41.291,1.27 33.093,1.27 30.655,3.708 30.655,6.985 32.992,6.985 33.678,6.299 33.652,6.274 33.652,3.988 34.333,3.307 38.254,3.307
VCC on Top Layer "VCC Top" (solid, remove dead copper, pour order 90): 67.21,22.987 61.93,22.987 61.93,42.43 67.21,42.43
Cap+ on Top Layer "CAP+_L01_P100" (solid, remove dead copper, pour order 100): 17.414,15.138 17.414,3.736 12.875,3.728 12.875,15.138
Cap+ on Top Layer "CAP+_L01_P098" (solid, remove dead copper, pour order 98): 33.195,15.85 33.195,3.738 24.254,3.738 24.254,13.335 26.769,15.85
NetD1_D1- on Top Layer "HV D1-" (solid, remove dead copper, pour order 92): 60.215,24.841 60.226,21.001 60.216,20.991 60.216,16.792 54.963,16.792 54.963,22.936 56.868,24.841
GND on Bottom Layer "GND_L02_P104" (solid, remove dead copper, pour order 104): 64.107,17.399 64.056,21.336 59.027,21.336 59.027,43.043 0,43.182 0,0.025 64.056,0.025 64.107,-0.025
VCC on Bottom Layer "VCC_L02_P087" (solid, remove dead copper, pour order 87): 67.76,43.078 60.271,43.078 49.781,32.588 34.465,32.588 34.465,26.467 49.349,26.467 49.349,21.488 67.76,21.488
NetL1_2 on Bottom Layer "NETL1_2_L02_P085" (solid, remove dead copper, pour order 85): 35.71,37.795 35.71,29.058 43.355,29.058 43.431,29.134 43.431,37.795
NetC1_1 on Bottom Layer "Bottom Layer-NetC1_1" (solid, pour order 80): 49.577,32.409 56.22,39.052 56.22,40.49 58.26,42.53 62.62,42.53 62.62,41.85 52.92,32.15 52.92,29.209 49.577,29.209
Vs on Bottom Layer "VS_L02_P088" (solid, remove dead copper, pour order 88): 26.87,38.049 15.72,38.049 15.72,24.768 20.117,24.768 20.165,26.492 20.117,31.471 26.87,31.521
Cap+ on Bottom Layer "HV Cap+" (solid, remove dead copper, pour order 82): 33.246,4.713 33.246,8.915 30.604,11.557 13.485,11.557 13.485,3.887 32.339,3.885
Source on Bottom Layer "SOURCE_L02_P089" (solid, remove dead copper, pour order 89): 43.101,14.605 49.016,14.605 49.016,16.405 45.746,16.405 43.101,16.405
NetL2_7 on Bottom Layer "NETL2_7_L02_P081" (solid, remove dead copper, pour order 81): 41.882,22.987 46.403,22.987 46.403,20.447 41.882,20.447
NetD4_2 on Bottom Layer "NETD4_2_L02_P083" (solid, remove dead copper, pour order 83): 33.881,31.267 33.881,36.932 26.693,36.932 26.693,31.267

## Keep-outs
Top Layer:
  lines w0.254: -0.08,-0.07 -0.08,43.07 -0.058,43.092 67.747,43.092 67.747,-0.043 -0.053,-0.043 ; 0,43.078 67.76,43.078 ; 0,43.078 0,0 67.76,0 ; 0,43.078 0,43.078 ; 0,43.104 0,0.025 67.76,0.025 ; 0,43.104 67.76,43.104 ; 0,43.104 0,43.104 ; 67.76,0 67.76,0 ; 67.76,0 67.76,43.078 ; 67.76,0.025 67.76,0.025 ; 67.76,0.025 67.76,43.104 ; 67.76,43.078 67.76,43.078 ; 67.76,43.104 67.76,43.104
Bottom Layer:
  lines w0.254: 0,0.025 0.015,0.01 67.76,0.01 67.76,43.078 67.758,43.08 0,43.08 0,0.025
Keep-Out Layer:
  lines w0.254: 0.03,-0.03 67.74,-0.03 67.74,43.05 0.03,43.05 0.03,-0.03

## Silkscreen, mask and mechanical layers (free items; w line width, h text height)
Mechanical 1:
  lines w0.2: 0.81,0 32.814,0 ; 0.81,0 0.81,43.078 ; 0.81,0 67.028,0 ; 0.81,0 0.81,43.078 ; 0.81,0 67.028,0 ; 0.81,0 0.81,43.078 ; 0.81,0 0.81,43.078 ; 0.81,0 32.814,0 ; 0.81,43.078 67.028,43.078 ; 0.81,43.078 67.028,43.078 ; 0.81,43.078 67.028,43.078 ; 0.81,43.078 67.028,43.078 ; 32.814,0 67.028,0 ; 32.814,0 67.028,0 ; 67.028,0 67.028,43.078 ; 67.028,0 67.028,43.078 ; 67.028,0 67.028,43.078 ; 67.028,0 67.028,43.078